# Altium PCB Power&CH341A.PcbDoc
Units mil, origin at the board's own origin, x right, y up, seen from the top; angles counter-clockwise.
Board outline 1300 x 1320 mil, 2 copper layers (Top Layer, Bottom Layer); 26 components, 35 nets, 123 pads, 0 vias.
Unrouted connection lines stored in the file: 41.
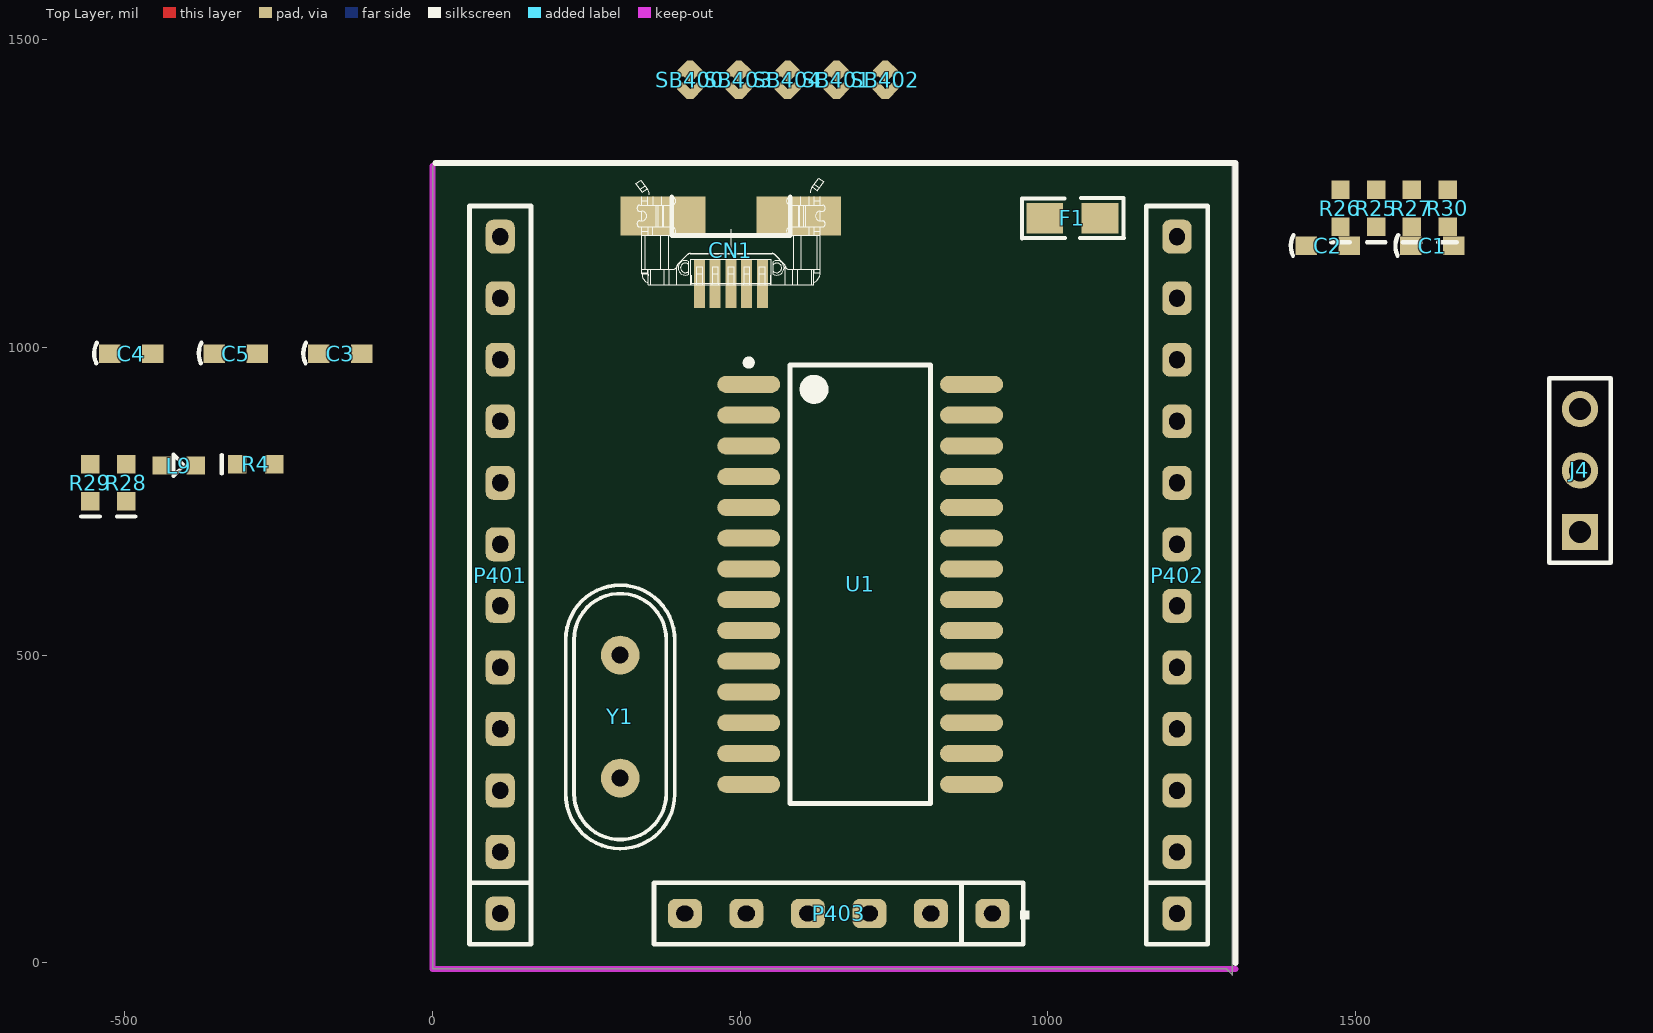
[diagram p0: Top Layer view]
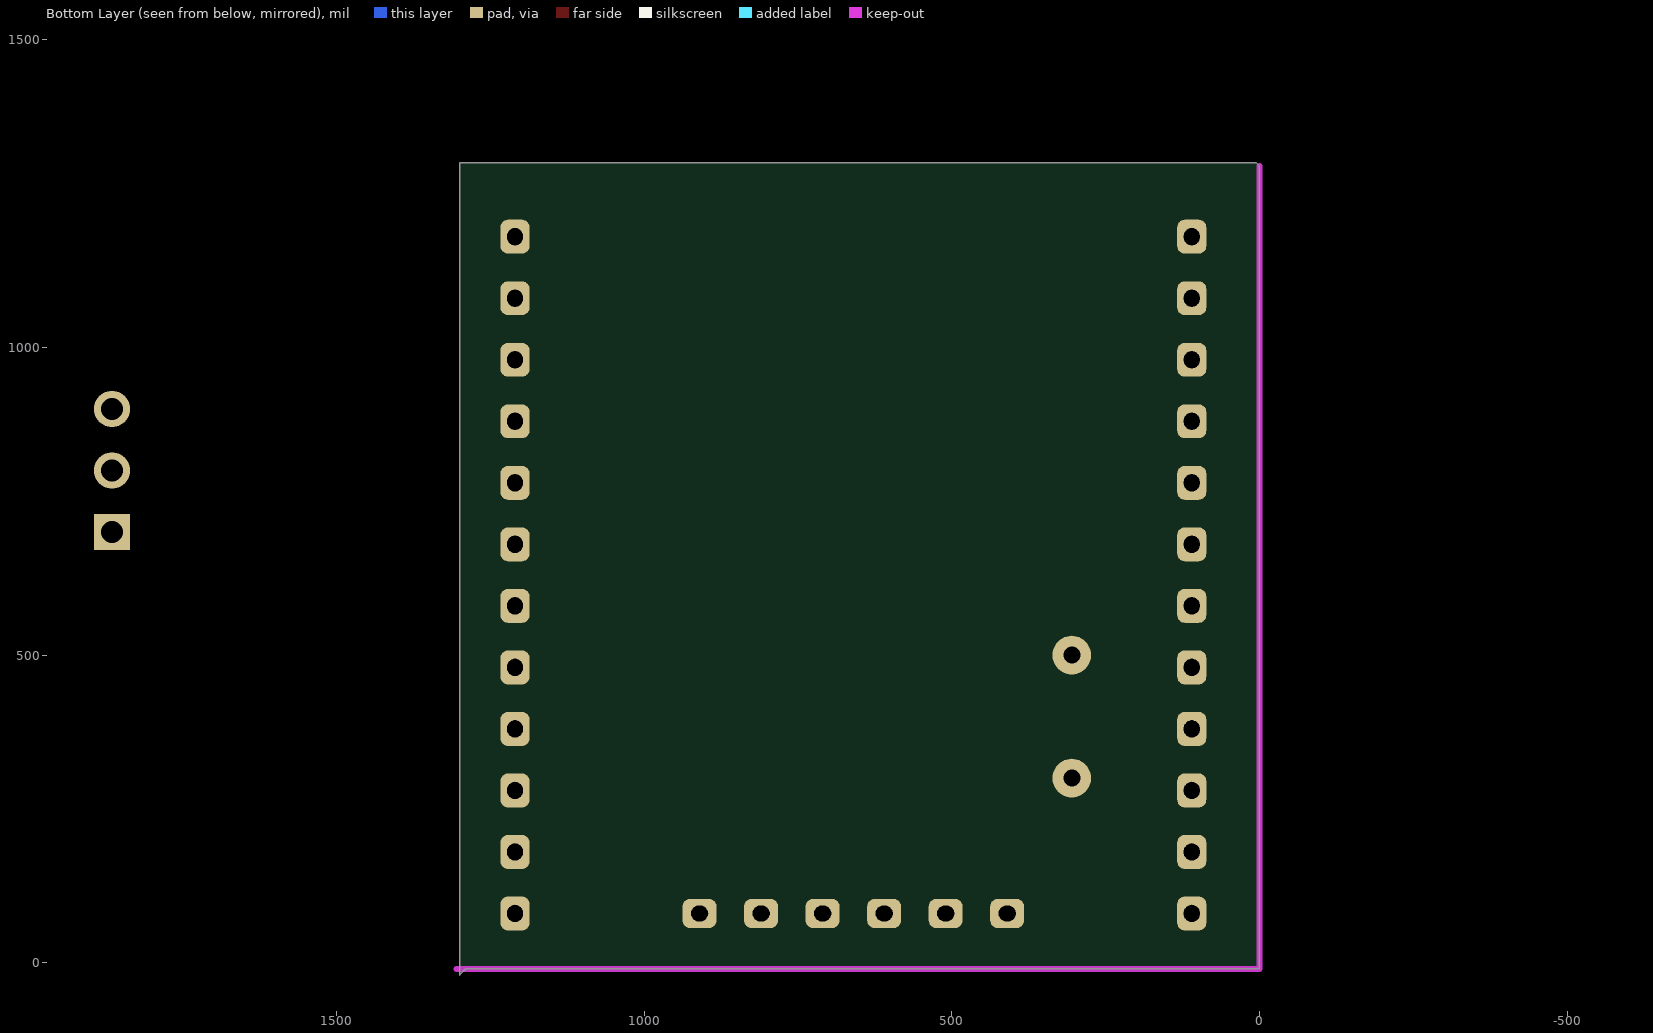
[diagram p1: Bottom Layer view, seen from below]

## Layer stack, top to bottom
Top Solder: solder mask 0.4, Solder Resist, Dk 3.5
Top Layer: signal copper 1.4
Dielectric1: dielectric 12.6, FR-4, Dk 4.8
Bottom Layer: signal copper 1.4
Bottom Solder: solder mask 0.4, Solder Resist, Dk 3.5

## Board outline
0,1295 5,1300 1300,1300 1300,-20 1290,-10 0,-10

## Design rules (kind name [scope] priority, off if disabled: settings)
Clearance [All] p1: gap=6
PolygonConnect [All] p1: connectstyle=Relief reliefconductorwidth=10 reliefentries=4 polygonreliefangle="90 Angle" airgapwidth=10
RoomDefinition Power&CH341A [InComponentClass('Power&CH341A')] p1: confinementstyle=ConfineIn formatcopy=TRUE lockcomponents=FALSE outline 0,-5 1300,-5 1300,1300 0,1300
RoutingVias [All] p1: holewidth=12 width=25 viastyle="Through Hole" minholewidth=12 minwidth=25 maxholewidth=28 maxwidth=50
SolderMaskExpansion [All] p1: expansion=4
Width [All] p1: maxlimit=55 minlimit=7 preferedwidth=10
29 further rules are at their usual default settings.

## Components (designator, comment, footprint, x,y, rotation, side; value= is the part's Value field where it differs from the comment)
C1 "Cap" C0603L 1625,1165 r0 top
C2 "Cap" C0603L 1455,1165 r0 top
C3 "Cap" C0603L -150,990 r0 top
C4 "Cap" C0603L -490,990 r0 top
C5 "Cap" C0603L -320,990 r0 top
CN1 "USB-Micro" USB-MICRO-Female-Lite 485,1210 r0 top
F1 "500mA" 0805 995,1210 r0 top
J4 "CON3" HDR1X3 1865,700 r90 top
L9 "LED" 0603pn -440,808.09 r0 top
P401 "Synio Header-L 12-Pin" HDR1X12-L/2.54MM 110,80 r90 top locked
P402 "Synio Header-R 12-Pin" HDR1X12-L/2.54MM 1210,80 r90 top locked
P403 "Synio Power Header 6 Pin" HDR1X6-L/2.54MM 910,80 r180 top locked
R4 "Res" R0603 -287.5,810.09 r0 top
R25 "Res" R0603 1533.74,1226 r90 top
R26 "Res" R0603 1475.74,1226 r90 top
R27 "Res" R0603 1591.74,1226 r90 top
R28 "Res" R0603 -498,780.09 r90 top
R29 "Res" R0603 -556,780.09 r90 top
R30 "Res" R0603 1649.74,1226 r90 top
SB400 "Circuit Breaker" JP2_SMD 418.45,1435.43 r90 top
SB401 "Circuit Breaker" JP2_SMD 656.65,1435.43 r90 top
SB402 "Circuit Breaker" JP2_SMD 736.04,1435.43 r90 top
SB403 "Circuit Breaker" JP2_SMD 497.85,1435.43 r90 top
SB404 "Circuit Breaker" JP2_SMD 577.25,1435.43 r90 top
U1 "CH341A_P" SO28_M 695,615 r0 top
Y1 "XTAL" XTAL_49S 305,400 r90 top

## Footprints (in the part's own frame and the unit in brackets; to place one, negate y for a bottom-side part, rotate by r counter-clockwise, add the part's x,y. Pads: shape width x height; smd on the part's side, far side on the other; paste and mask are expansions set on the pad)
0603pn [mil]
  rect 30x30 smd: 1(0,0) 2(55,0)
  silkscreen extent 19,-17 36,18
0805 [mil]
  rect 60x50 smd: 1(0,0) 2(90,0)
  silkscreen extent -37,-33 129,33
C0603L [mil]
  rect 35x30 smd: 1(-35,0) 2(35,0)
  silkscreen extent -60,-16 -56,18, body extent -31,-16 32,15, height 24
HDR1X3 [mm] "Connector; Header; 3 Position"
  rect 1.5x1.5 hole 0.9: 1(0,0)
  round 1.5 hole 0.9: 2(2.54,0) 3(5.08,0)
  silkscreen extent -1.27,-1.27 6.35,1.27
HDR1X6-L/2.54MM [mm] "Connector; Header; 6 Position"
  rrect50% 1.4x1.2 hole 0.65 slot 0.7 at 0 deg: 1(0,0) 2(2.54,0) 3(5.08,0) 4(7.62,0) 5(10.16,0) 6(12.7,0)
  silkscreen extent -1.52,-1.27 13.97,1.27
HDR1X12-L/2.54MM [mm] "Connector; Header; 12 Position"
  rrect50% 1.4x1.2 hole 0.65 slot 0.7 at 0 deg: 1(0,0) 2(2.54,0) 3(5.08,0) 4(7.62,0) 5(10.16,0) 6(12.7,0) 7(15.24,0) 8(17.78,0) 9(20.32,0) 10(22.86,0) 11(25.4,0) 12(27.94,0)
  silkscreen extent -1.27,-1.27 29.21,1.27
JP2_SMD [mil]
  oct 15x30 smd rot 45: 1(-18,-8) 2(18,7)
  oct 15.75x30 smd rot 135: 1(-18,8)
  rect 26x26 smd rot 45: 2(13,0)
  oct 15x30 smd rot 135: 2(18,-7)
R0603 [mil]
  rect 30x30 smd: 1(-30,0) 2(30,0)
  silkscreen extent -55,-15 -55,15, body extent -31,-16 32,15, height 18
SO28_M [mm] "28-Pin Plastic Small Outline Integrated Circuit 1.27 mm Pitch, IPC Low Density"
  oval 2.6x0.7 smd: 1(-4.6,8.255) 2(-4.6,6.985) 3(-4.6,5.715) 4(-4.6,4.445) 5(-4.6,3.175) 6(-4.6,1.905) 7(-4.6,0.635) 8(-4.6,-0.635) 9(-4.6,-1.905) 10(-4.6,-3.175) 11(-4.6,-4.445) 12(-4.6,-5.715) 13(-4.6,-6.985) 14(-4.6,-8.255) 15(4.6,-8.255) 16(4.6,-6.985) 17(4.6,-5.715) 18(4.6,-4.445) 19(4.6,-3.175) 20(4.6,-1.905) 21(4.6,-0.635) 22(4.6,0.635) 23(4.6,1.905) 24(4.6,3.175) 25(4.6,4.445) 26(4.6,5.715) 27(4.6,6.985) 28(4.6,8.255)
  silkscreen extent -4.72,-9.05 2.9,9.28, body extent -3.8,-9.06 3.8,9.06, height 2.65
USB-MICRO-Female-Lite [mm] "Connector; USB2.0, Type B, SM; 5 Position; Right Angle"
  rect 3.5x1.6 smd: 0(-2.802,0.088) 0(2.798,0.088)
  rect 0.45x2 smd: 1(1.298,-2.714) 2(0.648,-2.714) 3(-0.002,-2.714) 4(-0.652,-2.714) 5(-1.302,-2.714)
  silkscreen extent -3.92,-2.74 3.88,1.65
XTAL_49S [mm] "Hole 1.6mm"
  round 1.6 hole 0.7: 1(2.54,0) 2(-2.54,0)
  silkscreen extent -5.45,-2.25 5.42,2.25

## Part data
C1 C2 C3 C4 C5: "Capacitor"
F1: library part "Fuse 1", "Fuse"
J4: "CON 3-Pin"
L9: "Typical RED, GREEN, YELLOW, AMBER GaAs LED"
P401: "Synio Header-L, 12-Pin"
P402: "Synio Header-R, 12-Pin"
R4 R25 R26 R27 R28 R29 R30: "Resistor"
U1: library part CH341A, "USB bus convert chip"
Y1: "Crystal Oscillator"

## Nets (pads, with @x,y where several pads share a name; then routed paths per layer and width w, separated by ;. In a path a pad name is that pad's centre, name@x,y a point inside that pad or via, vN(x,y) a via of type N, cw(c..) or ccw(c..) an arc to the next point about the centre after c; other vN are vias at no path point)
CE: SB403.2 SB404.2
CH34IV3: C3.1 U1.9
CSN: P401.2
D3V3: P403.1
D5V: F1.1
GND: CN1.0 CN1.5 P401.1 P402.1 P403.2
GNDUSB: C1.1 C3.2 C4.1 C5.1 J4.3 U1.12 U1.27
INT0: SB400.2 SB401.2 SB402.2
MISO: P401.4 R27.2
MOSI: P401.5 R28.2
NetC2_1: C2.1 U1.2
NetC4_2: C4.2 U1.13 Y1.1
NetC5_2: C5.2 U1.14 Y1.2
NetCN1_1: CN1.1 F1.2
NetL9_2: L9.2 R4.1
NetP401_10: P401.10 SB402.1
NetP401_11: P401.11 SB401.1
NetP401_12: P401.12 SB400.1
NetP402_2: P402.2 SB404.1
NetP402_3: P402.3 SB403.1
NetR4_2: R4.2 U1.1
NetR27_1: R27.1 U1.22
NetR28_1: R28.1 U1.20
NetR29_1: R29.1 U1.18
NetR30_1: R30.1 U1.16
NRST: P403.5
RST: R30.2
RX0: P401.9 U1.6
SCK: P401.3 R29.2
SCL: U1.24
SDA: J4.2 U1.23
TX0: P401.8 U1.5
UD+: U1.10
UD-: U1.11
VCCA: C1.2 C2.2 L9.1 U1.28
pads on no net: CN1.2 CN1.3 CN1.4 J4.1 P401.6 P401.7 P402.4 P402.5 P402.6 P402.7 P402.8 P402.9 P402.10 P402.11 P402.12 P403.3 P403.4 P403.6 R25.1 R25.2 R26.1 R26.2 U1.3 U1.4 U1.7 U1.8 U1.15 U1.17 U1.19 U1.21 U1.25 U1.26

## Keep-outs
Keep-Out Layer:
  lines w10: 0,1295 0,-10 1305,-10

## Silkscreen, mask and mechanical layers (free items; w line width, h text height)
Top Overlay:
  lines w10: 5,1300 1305,1300 1305,0